# Altium PCB Astable_PCB.PcbDoc
Units mil, origin at the board's own origin, x right, y up, seen from the top; angles counter-clockwise.
Board outline 5098.31 x 4848.78 mil, 2 copper layers (Top Layer, Bottom Layer), stack 62.8 mil thick; 29 components, 12 nets, 62 pads, 8 vias.
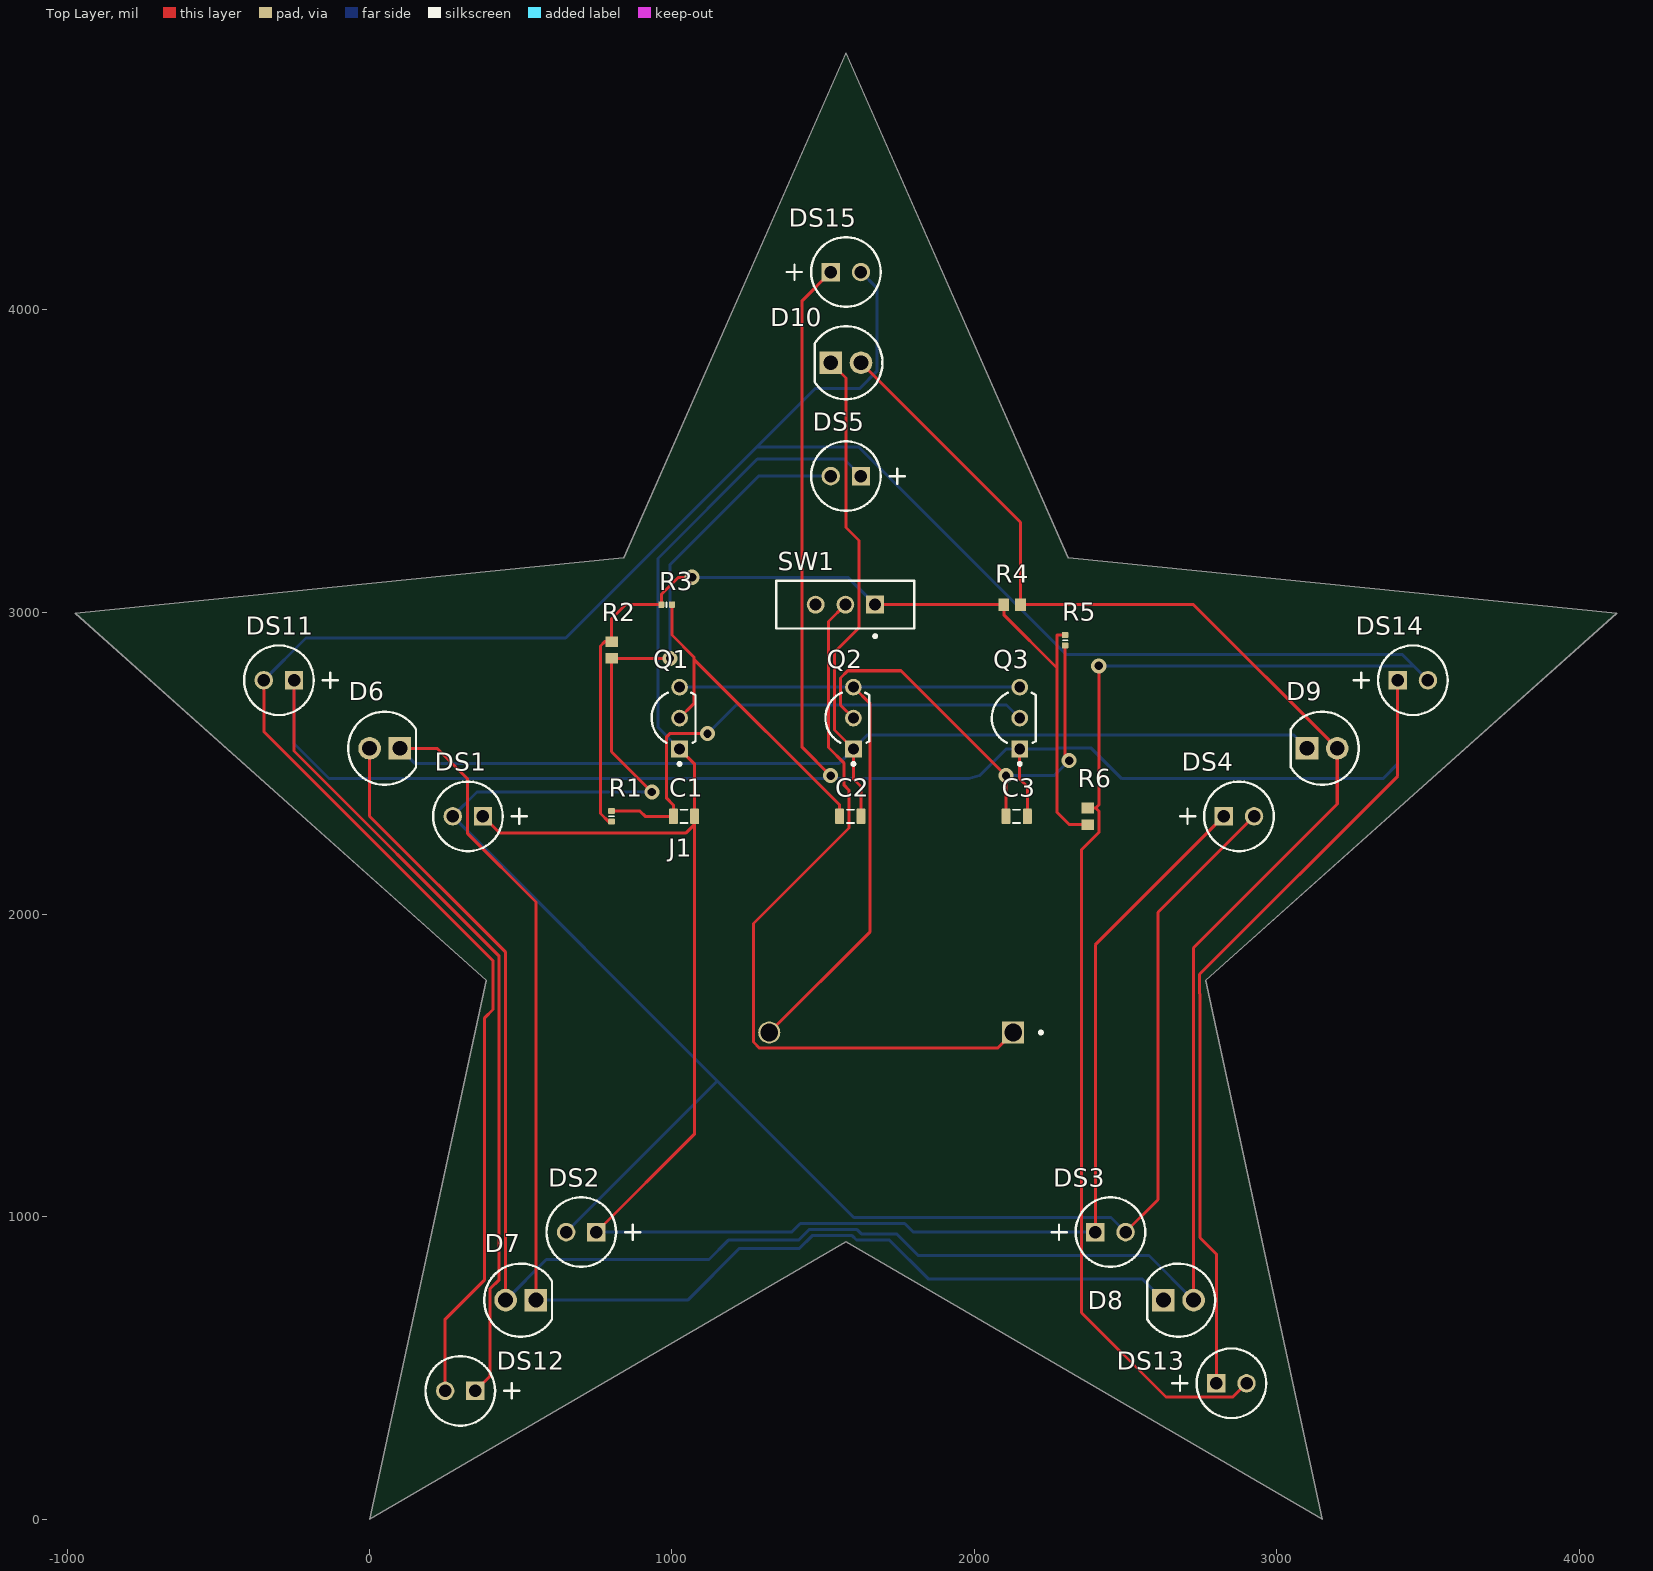
[diagram p0: Top Layer view]
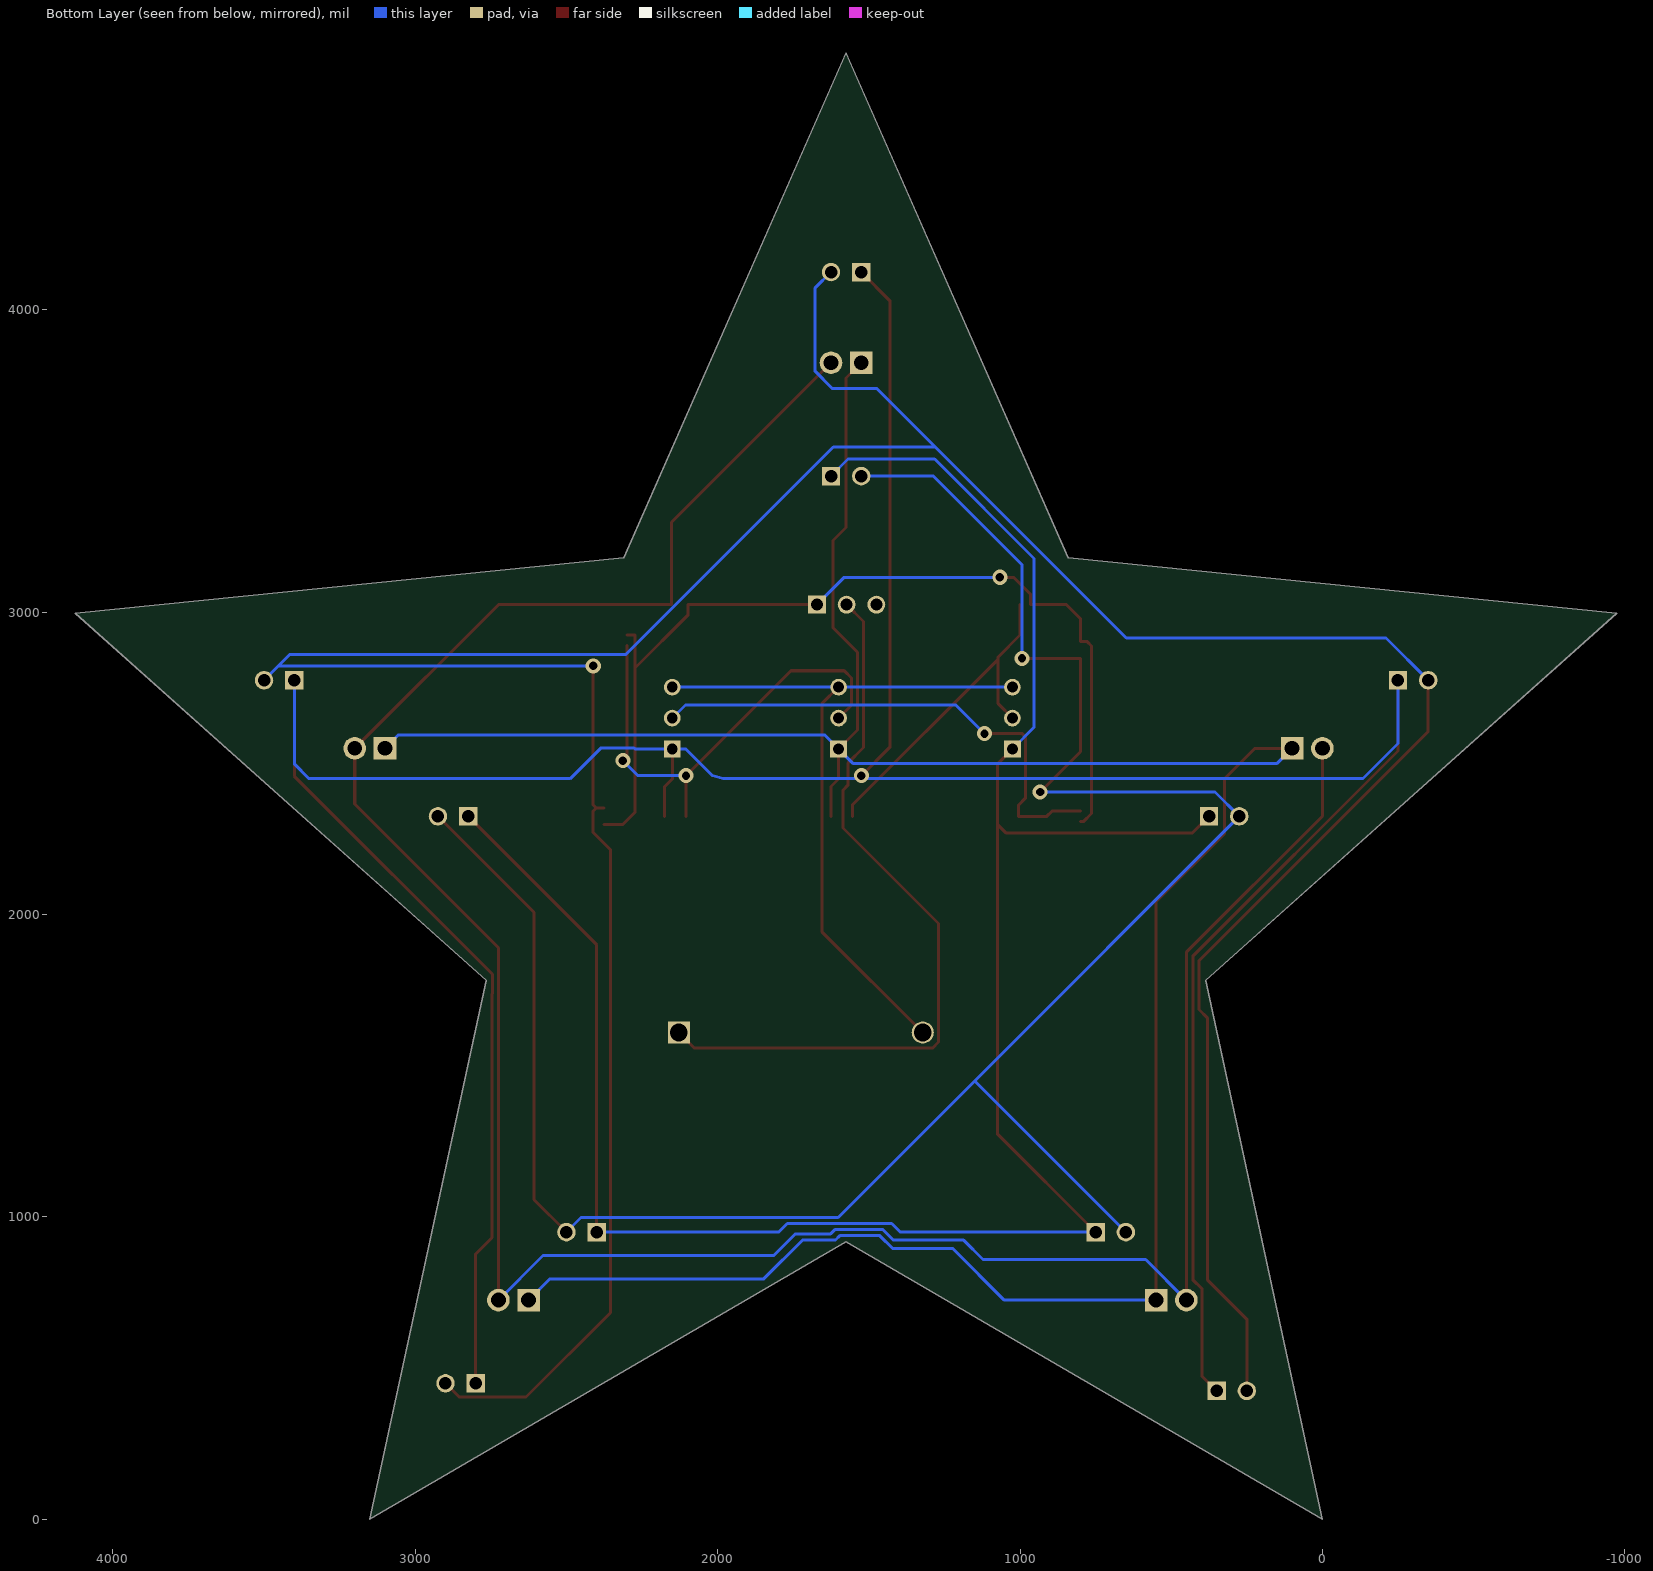
[diagram p1: Bottom Layer view, seen from below]
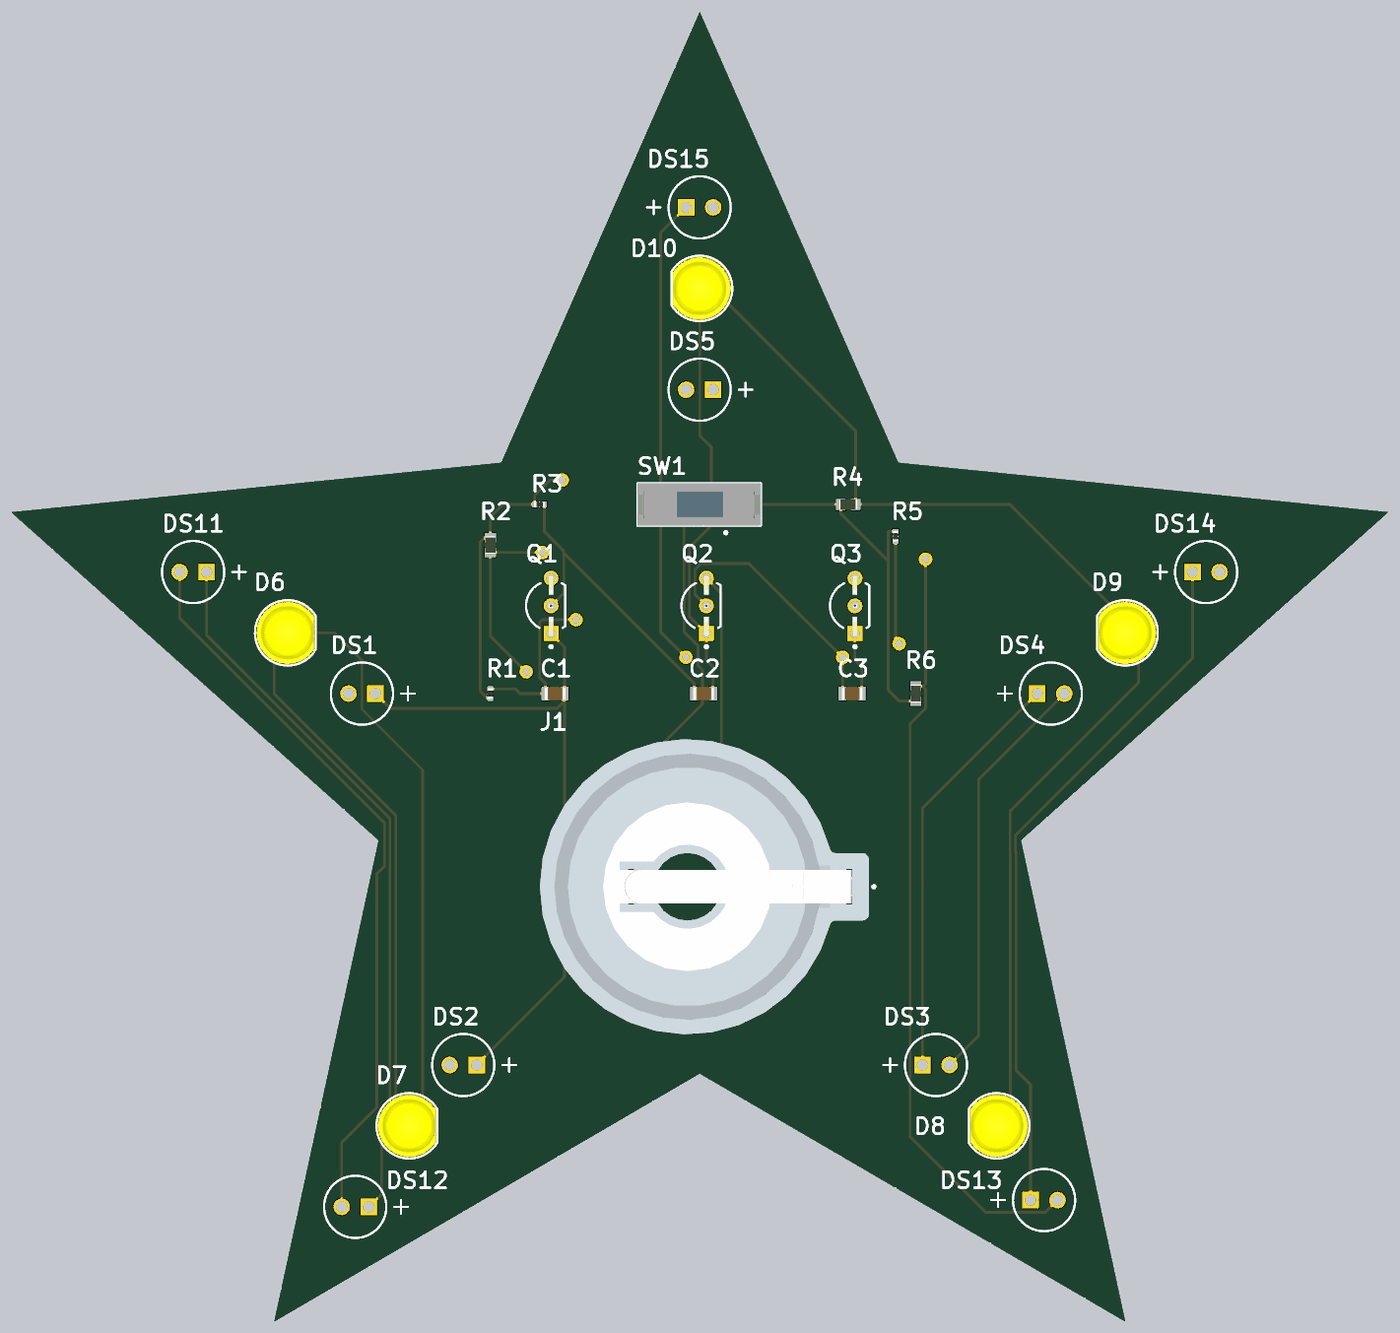
[diagram p2: 3D render of the assembled board from above, using the file's embedded part models]

## Layer stack, top to bottom
Top Solder: solder mask 0.4, Solder Resist, Dk 3.5
Top Layer: signal copper 1.4
Dielectric 1: dielectric 60, FR-4, Dk 4.8
Bottom Layer: signal copper 1.4
Bottom Solder: solder mask 0.4, Solder Resist, Dk 3.5

## Board outline
0,0 386.39,1782.08 -973.7,2996.71 840.57,3179.93 1575.46,4848.78 2310.35,3179.93 4124.61,2996.71 2764.53,1782.08 3150.91,0 1575.46,918.17

## Design rules (kind name [scope] priority, off if disabled: settings)
BoardOutlineClearance [All] p1: gap=10 ignorepadtopadclearanceinfootprint=FALSE
Clearance [All] p1: gap=10 ignorepadtopadclearanceinfootprint=FALSE except(0: Arc-Hole Track-Hole SMDPad-Hole THPad-Hole Via-Hole Fill-Hole Poly-Hole Region-Hole Text-Hole)
PolygonConnect [All] p1: connectstyle=Relief reliefconductorwidth=10 reliefentries=4 polygonreliefangle="90 Angle" airgapwidth=10
RoutingVias [All] p1: holewidth=28 width=50 viastyle="Through Hole" minholewidth=28 minwidth=50 maxholewidth=28 maxwidth=50
SilkToSolderMaskClearance [IsPad] p1: minsilkscreentomaskgap=5 clearancetoexposedcopper=TRUE
SolderMaskExpansion [All] p1: expansion=4 istentingtop=FALSE
Width [All] p1: maxlimit=10 minlimit=10 preferedwidth=10
29 further rules are at their usual default settings.

## Components (designator, comment, footprint, x,y, rotation, side; value= is the part's Value field where it differs from the comment)
C1 "Capacitor 100µF +/-20% 6.3V 0805" CAPC0805(2012)145_L 1039.96,2325 r0 top value=100µF
C2 "Capacitor 100µF +/-20% 6.3V 0805" CAPC0805(2012)145_L 1589.96,2325 r0 top value=100µF
C3 "Capacitor 100µF +/-20% 6.3V 0805" CAPC0805(2012)145_L 2139.96,2325 r0 top value=100µF
D6 "SSL-LX5093YD" FP-SSL-LX5093YD-MFG 50,2550 r180 top
D7 "SSL-LX5093YD" FP-SSL-LX5093YD-MFG 500,725 r180 top
D8 "SSL-LX5093YD" FP-SSL-LX5093YD-MFG 2675,725 r0 top
D9 "SSL-LX5093YD" FP-SSL-LX5093YD-MFG 3150,2550 r0 top
D10 "SSL-LX5093YD" FP-SSL-LX5093YD-MFG 1575,3825 r0 top
DS1 "HLMP-3301" AVAG-HLMP-3301-2 375,2325 r180 top
DS2 "HLMP-3301" AVAG-HLMP-3301-2 750,950 r180 top
DS3 "HLMP-3301" AVAG-HLMP-3301-2 2400,950 r0 top
DS4 "HLMP-3301" AVAG-HLMP-3301-2 2825,2325 r0 top
DS5 "HLMP-3301" AVAG-HLMP-3301-2 1625,3450 r180 top
DS11 "HLMP-3301" AVAG-HLMP-3301-2 -250,2775 r180 top
DS12 "HLMP-3301" AVAG-HLMP-3301-2 350,425 r180 top
DS13 "HLMP-3301" AVAG-HLMP-3301-2 2800,450 r0 top
DS14 "HLMP-3301" AVAG-HLMP-3301-2 3400,2775 r0 top
DS15 "HLMP-3301" AVAG-HLMP-3301-2 1525,4125 r0 top
J1 "1025-7" KEYSTONE-1025-7-2_V 1725,1610 r90 top
Q1 "BC547BRL1G" ONSC-TO-92-3-29-11_AM_BL 1025,2650 r90 top
Q2 "BC547BRL1G" ONSC-TO-92-3-29-11_AM_BL 1600,2650 r90 top
Q3 "BC547BRL1G" ONSC-TO-92-3-29-11_AM_BL 2150,2650 r90 top
R1 "22KR2F" RESC0402(1005)_L 800,2325 r90 top value=22k
R2 "Resistor 22R +/-1% 0603 100 mW" RESC1609X50X30ML08T20 800,2875 r270 top value=22
R3 "22KR2F" RESC0402(1005)_L 982.28,3025 r0 top value=22k
R4 "Resistor 22R +/-1% 0603 100 mW" RESC1609X50X30ML08T20 2125,3025 r0 top value=22
R5 "22KR2F" RESC0402(1005)_L 2300,2907.28 r270 top value=22k
R6 "Resistor 22R +/-1% 0603 100 mW" RESC1609X50X30ML08T20 2375,2325 r90 top value=22
SW1 "EG1218" ESWI-EG1218_V 1573.43,3025 r180 top

## Footprints (in the part's own frame and the unit in brackets; to place one, negate y for a bottom-side part, rotate by r counter-clockwise, add the part's x,y. Pads: shape width x height; smd on the part's side, far side on the other; paste and mask are expansions set on the pad)
AVAG-HLMP-3301-2 [mm] "THD, 2-Leads, Body Dia 5.85mm"
  rect 1.55x1.55 hole 1.05: 1(0,0)
  round 1.55 hole 1.05: 2(2.54,0)
  silkscreen extent -3.68,-2.92 4.19,2.92
CAPC0805(2012)145_L [mm] "Chip Capacitor, Body 2.0x1.2mm, Height 1.45mm, IPC High Density"
  rrect25% 0.76x1.3 smd: 1(-0.9,0) 2(0.89,0)
  silkscreen extent -0.3,-0.55 0.3,0.55, body extent -1,-0.6 1,0.6, height 1.45
ESWI-EG1218_V [mm] "THD, 3-Leads, Body 11.6x4mm, Pitch 2.5mm"
  rect 1.5x1.5 hole 1: 1(-2.5,0)
  round 1.5 hole 1: 2(0,0) 3(2.5,0)
  silkscreen extent -5.8,-2 5.8,2.77, body extent -5.8,-2 5.8,2, height 7.4
FP-SSL-LX5093YD-MFG [mm]
  rect 1.9x1.9 hole 1.25 paste-1000 mask+0: 1(-1.27,0)
  round 1.9 hole 1.25 paste-1000 mask+0: 2(1.27,0)
  silkscreen extent -2.62,-3.07 3.07,3.07, body extent -3.17,-3.17 3.17,3.17, height 0.25
KEYSTONE-1025-7-2_V [mm] "SON, 10-Leads, Body 2.5 x 2.5 mm, Pitch 0.5 mm, Thermal Pad 2 x 1.2 mm"
  rect 1.85x1.85 hole 1.5: 1(0,-10.245)
  round 1.85 hole 1.5: 2(0,10.245)
  silkscreen extent -0.12,-12.69 0.13,-12.45, body extent -13.88,-12.13 13.88,18.84, height 12.58
ONSC-TO-92-3-29-11_AM_BL [mm] "TO, 3-Leads, Body Dia 4.7mm, Pitch 2.6mm"
  rect 1.4x1.4 hole 0.9: 1(-2.6,0)
  round 1.4 hole 0.9: 2(0,0) 3(2.6,0)
  silkscreen extent -3.97,-1.34 2.13,2.35, body extent -2.84,-1.34 2.84,2.35, height 5.33
RESC0402(1005)_L [mm] "Chip Resistor, Body 1.0x0.5mm, IPC High Density"
  rrect25% 0.5x0.55 smd: 1(-0.45,0) 2(0.45,0)
  silkscreen extent 0,-0.2 0,0.2, body extent -0.5,-0.25 0.5,0.25, height 0.3
RESC1609X50X30ML08T20 [mm] "Chip Resistor, 2-Leads, Body 1.65x0.95mm, IPC Low Density"
  rect 0.9x1.05 smd: 1(-0.7,0) 2(0.7,0)
  body extent -0.82,-0.48 0.82,0.48, height 0.5

## Part data
C1 C2 C3: library part CMP-001-00054-4, "Chip Capacitor, 100µF +/-20%, 6.3V, 0805, Thickness 1.45 mm", Case/Package=0805, Max Operating Temperature=85°C, Min Operating Temperature=-55°C, Tolerance=10%, Voltage Rating=6.3V, Mounting Technology=SMT, Pins=2
D6 D7 D8 D9 D10: library part CMP-57192-000007-1, "LED YELLOW DIFFUSED T-1 3/4 T/H", Case/Package=Radial, Color=Yellow, Forward Current=20mA, Forward Voltage=2.1V, Max Operating Temperature=85°C, Min Operating Temperature=-40°C, Package Quantity=1000, Diameter=5mm, Dominant Wavelength=568nm, Height=8.6mm, Illumination Color=Yellow, Lead Free="Lead Free", Length=0.5inch, Lens Color=Yellow, Lens Style=Dome, Lens Transparency=Diffused, Luminous Intensity=30mcd, Mount="Through Hole", Number of LEDs=1, Number of Pins=2, Packaging=Bulk, REACH SVHC="No SVHC", RoHS Compliant=Yes, Series=-, Test Current=20mA, Viewing Angle=60°, Wavelength=585nm, Weight=0.01lb, Width=1.5inch
DS1 DS2 DS3 DS4 DS5 DS11 DS12 DS13 DS14 DS15: library part CMP-2000-06411-1, "T-1 3/4 (5 mm) Diffused LED Lamp, 1.9 V, -40 to 100 degC, 2-Pin THD, RoHS, Bulk", Emitting Color=Red, Forward Current=25mA, Forward Voltage=2.4V, Manufacturer=Avago, Operating Temp Range=-40Cto100C, Operating Temperature Classification=Industrial, Package Description="2-Pin Through Hole LED, Dia 5.85 mm", Package Type=T-13/4, Power Dissipation=85W, Reverse Voltage=5V, Test Current (It)=10mA, Chip Material=GaP, Datasheet URL=http://www.avagotech.com/docs/AV02-1558EN, Datasheet Version=03/2015, DELETED=Compliant, Dominant Wave Length=626nm, High Brightness=No, Lens Dimensions=5.08x5.08x8.3mm, Lens Type=ColoredDiffused, Lum Intensity=5.4mcd, Luminous Intensity=5.4mcd, Main Category=StandardLED, Manufacturer URL=http://www.avagotech.com/, Mounting=ThroughHole, Mounting Technology=ThroughHole, Number of  Elements=1, Package Reference=HLMP-3301, Packaging=TapeandReel, Peak Wavelength=635nm, Pin Count=2, Product Depth (mm)=6.1mm, Product Height (mm)=9.19mm, Product Length (mm)=6.1mm, Rad Hardened=No, Shape Type=Circular, Type=Uni-Color, Viewing Angle=60deg
J1: library part CMP-0465-00001-2, "Holder for 2477 or 2430 Cells P/N 1025-7, Body 27.762 x 30.963 mm, THM", Manufacturer=Keystone, Switch Current Limit (Typ) (A)=1, # of Cells=1, Cell Size="24 mm", ComponentLink1Description="Manufacturer URL", ComponentLink1URL=http://www.keyelco.com/, ComponentLink2Description=Datasheet, ComponentLink2URL=http://www.keyelco.com/product-pdf.cfm?p=3950, DatasheetVersion=Rev.C, Material=Plastic, Mounting Technology="Through Hole", PackageDescription="2-Pin Hand Drawn, Body 27.762 x 30.963 mm", PackageReference=KEYSTONE-1025-7-2, PartNumber=1025-7, Type=HOLDER
Q1 Q2 Q3: library part CMP-1048-01605-1, "Amplifier Transistor, NPN Silicon, 3-Pin TO-92, Pb-Free, Tape and Reel", Manufacturer="On Semiconductor", ComponentLink1Description="Manufacturer URL", ComponentLink1URL=http://www.onsemi.com/, ComponentLink2Description=Datasheet, ComponentLink2URL=http://www.onsemi.com/pub_link/Collateral/BC546-D.PDF, ComponentLink3Description="Package Specification", ComponentLink3URL=http://www.onsemi.com/pub_link/Collateral/MAC97-D.PDF, DatasheetVersion="Rev. 7", fT Min (MHz)=150, IC Continuous (A)=0.1, Mounting Technology="Through Hole", PackageDescription="3-Pin Transistor Outline, Body 4.825 x 3.685 mm, Pitch 1.27 mm", PackageReference=TO-92-3-29-11_AM_BL, PackageVersion="Rev. AM", Packing="Tape and Reel", PartNumber=BC547BRL1G, Polarity=NPN, RoHS=TRUE
R1 R3 R5: library part CMP-009-00081-2, "22K 0.063W 1% 0402 (1005 Metric)  SMD", Case/Package=0402, Power=63mW, Tolerance=1%, Mounting Technology=SMT, Pins=2
R2 R4 R6: library part CMP-009-00027-5, "Chip Resistor, 22 Ohm, +/- 1%, 100 mW, -55 to 155 degC, 0603 (1608 Metric)", Case/Package=0603, Max Operating Temperature=155°C, Min Operating Temperature=-55°C, Power=100mW, Tolerance=1%, Voltage Rating=75V, Mounting Technology=SM, Pins=2, RoHS Compliant=True
SW1: library part CMP-011-00006-2, "Slide Switch, SPDT, 500 V, -20 to 70 degC, 3-Pin THD, RoHS, Bulk", Contact Current Rating=200mA, Manufacturer=E-Switch, Max Operating Temperature=70°C, Min Operating Temperature=-20°C, Operating Force=250gf, Package Description="3-Pin Through Hole Device, Body 11.6 x 4 mm, Pitch 2.5 mm", Package Quantity=1000, Voltage Rating (AC)=30V, Case/Package=EG1218, Contact Finish=Silver, Contact Material=Copper, Contact Plating=Silver, Current Rating=200mA, Datasheet URL=https://www.e-switch.com/system/asset/product_line/data_sheet/119/EG.pdf, Datasheet Version=Oct-15, Manufacturer URL=http://www.e-switch.ch/en/, Mounting Technology=TH, Package Reference=EG1218, Packaging=Bulk, Pins=3, RoHS Compliant=True, Throw Configuration=SPDT, Voltage Rating (DC)=30V

## Via types
v1: diameter 50, hole 28, Top Layer to Bottom Layer, 8 vias

## Nets (pads, with @x,y where several pads share a name; then routed paths per layer and width w, separated by ;. In a path a pad name is that pad's centre, name@x,y a point inside that pad or via, vN(x,y) a via of type N, cw(c..) or ccw(c..) an arc to the next point about the centre after c; other vN are vias at no path point)
+3V: J1.1 SW1.2 | length 2517.4
  Top Layer w10: SW1.2 1517.4,2968.98 1517.4,2552.3 1569.47,2500.23 1569.47,2427.38 1585.4,2411.44 1585.4,2286.44 1269.4,1970.44 1269.4,1578.44 1289.4,1558.44 2076.79,1558.44 J1.1
GND: J1.2 Q1.3 Q2.3 Q3.3 | length 2428.6
  Top Layer w10: J1.2 1655.4,1943.75 1655.4,2696.96 Q2.3
  Bottom Layer w10: Q1.3 Q2.3 Q3.3
NetC1_1: C1.1 Q3.2 R1.2 | length 1713.6
  Top Layer w10: R1.2 893.4,2342.72 911.12,2325 C1.1 1004.53,2362.44 982.4,2384.57 982.4,2588.44 992.4,2598.44 v1(1117.4,2598.44)
  Bottom Layer w10: v1(1117.4,2598.44) 1212.4,2693.44 2106.56,2693.44 Q3.2
NetC1_2: C1.2 DS1.1 DS2.1 DS3.1 DS4.1 DS5.1 Q1.1 | length 7202.3
  Top Layer w10: DS1.1 429.56,2270.44 1047,2270.44 1075,2298.44 ; DS2.1 1075,1275 1075,2298.44 ; Q1.1 1075,2497.64 C1.2 1075,2298.44 ; DS3.1 2400,1900 DS4.1
  Bottom Layer w10: DS2.1 1396.4,950 1424.57,978.17 1769.33,978.17 1797.49,950 DS3.1 ; Q1.1 953.4,2619.23 953.4,3177.44 1282.4,3506.45 1568.55,3506.45 DS5.1
NetC2_1: C2.1 Q1.2 R3.2 | length 1143.6
  Top Layer w10: R3.2 1000,2924.44 1072.4,2852.04 1072.4,2844.32 ; Q1.2 1072.4,2697.4 1072.4,2844.32 ; C2.1 1554.53,2362.19 1072.4,2844.32
NetC2_2: C2.2 D6.1 D7.1 D8.1 D9.1 D10.1 Q2.1 | length 9021.3
  Top Layer w10: D6.1 222.85,2550 324.4,2448.44 324.4,2267.44 550,2041.85 D7.1 ; D10.1 1575.4,3774.6 1575.4,3280.44 1618.4,3237.44 1618.4,2948.44 1537.44,2867.48 1537.44,2610.2 Q2.1 1600,2448.44 1625,2423.44 C2.2
  Bottom Layer w10: D6.1 149.56,2500.44 1552.81,2500.44 Q2.1 1646.81,2594.44 3055.56,2594.44 D9.1 ; D7.1 1051.96,725 1223.4,896.44 1421.68,896.44 1463.4,938.17 1595.9,938.17 1609.9,924.16 1718.68,924.16 1847.4,795.44 2554.56,795.44 D8.1
NetC3_1: C3.1 Q2.2 R5.2 | length 1600.6
  Top Layer w10: Q2.2 1557.44,2692.56 1557.44,2782.48 1581.4,2806.44 1757.53,2806.44 v1(2104.53,2459.44) C3.1 ; R5.2 2300,2522.85 v1(2313.4,2509.44)
  Bottom Layer w10: v1(2104.53,2459.44) 2263.4,2459.44 v1(2313.4,2509.44)
NetC3_2: C3.2 DS11.1 DS12.1 DS13.1 DS14.1 DS15.1 Q3.1 | length 11552.9
  Top Layer w10: DS11.1 -250,2540.85 428.4,1862.44 428.4,792.44 397.6,761.64 397.6,472.6 DS12.1 ; v1(1524.4,2459.44) 1430.4,2553.44 1430.4,4030.4 DS15.1 ; Q3.1 2150,2448.44 2175,2423.44 C3.2 ; DS13.1 2800,877.85 2746.4,931.44 2746.4,1737.44 2744.53,1739.32 2744.53,1802.44 3400,2457.92 DS14.1
  Bottom Layer w10: DS11.1 -250,2565.85 -134.6,2450.44 v1@1524.4,2450.44 ; v1(1524.4,2459.44) v1@1524.4,2450.44 ; DS14.1 3400,2498.44 3351,2449.44 2487.59,2449.44 2386.81,2550.23 2275.99,2550.23 2273.4,2547.64 Q3.1 2105.44,2547.64 2017.25,2459.44 1982.22,2450.44 v1@1524.4,2450.44
NetD6_2: D6.2 D7.2 D8.2 D9.2 D10.2 R4.2 | length 8764.4
  Top Layer w10: D6.2 0,2325.44 450,1875.44 D7.2 ; D10.2 2152.56,3297.44 R4.2 2725,3025 D9.2 3200,2365.44 2724.53,1889.97 2724.53,1717.86 2725,1717.38 D8.2
  Bottom Layer w10: D7.2 584.44,859.44 1122.4,859.44 1186.4,923.44 1418.4,923.44 1453.12,958.17 1612.4,958.17 1626.12,944.44 1742.4,944.44 1814.4,872.44 2577.56,872.44 D8.2
NetDS1_2: DS1.2 DS2.2 DS3.2 DS4.2 DS5.2 R2.2 | length 7397.7
  Top Layer w10: v1(933.4,2405.44) 800,2538.85 R2.2 v1(993.4,2847.44) ; DS3.2 2607.4,1057.4 2607.4,2007.4 DS4.2
  Bottom Layer w10: DS2.2 1150,1450 ; v1(933.4,2405.44) 355.44,2405.44 DS1.2 1150,1450 ; v1(993.4,2847.44) 993.4,3157.12 1286.28,3450 DS5.2 ; DS3.2 2451.56,998.44 1601.56,998.44 1150,1450
NetDS11_2: DS11.2 DS12.2 DS13.2 DS14.2 DS15.2 R6.2 | length 11988.1
  Top Layer w10: DS11.2 -350,2605.85 408.4,1847.44 408.4,1686.44 380.4,1658.44 380.4,792.51 250,662.11 DS12.2 ; R6.2 2401.4,2352.56 ; v1(2411.4,2822.44) 2411.4,2362.56 2401.4,2352.56 ; DS13.2 2854.44,404.44 2633.4,404.44 2354.4,683.44 2354.4,2214.44 2411.4,2271.44 2411.4,2342.56 2401.4,2352.56
  Bottom Layer w10: DS11.2 -210.56,2914.44 648.4,2914.44 1280.4,3546.44 ; DS15.2 1677.4,4072.6 1677.4,3796.44 1621.4,3740.44 1474.4,3740.44 1280.4,3546.44 ; v1(2411.4,2822.44) 3452.56,2822.44 ; DS14.2 3452.56,2822.44 ; 1280.4,3546.44 1617.4,3546.44 2304.4,2859.44 3415.56,2859.44 3452.56,2822.44
NetR1_1: R1.1 R2.1 R3.1 R4.1 R5.1 R6.1 SW1.1 | length 3145.7
  Top Layer w10: R1.1 790.56,2307.28 763.4,2334.44 763.4,2888.44 777.52,2902.56 R2.1 800,2978.44 846.56,3025 R3.1 964.57,3058.61 1021.4,3115.44 v1(1066.57,3115.44) ; SW1.1 R4.1 2097.44,2991.4 2273.4,2815.44 ; R5.1 2273.4,2925 2273.4,2815.44 ; R6.1 2314.41,2297.44 2273.4,2338.44 2273.4,2815.44
  Bottom Layer w10: v1(1066.57,3115.44) 1581.41,3115.44 SW1.1
pads on no net: SW1.3